# Altium PCB obc_comm.PcbDoc (part 2 of 3)
Units mm, origin at the board's own origin, x right, y up, seen from the top; angles counter-clockwise.
Board outline 95.89 x 90.17 mm, 4 copper layers (Top Signal, Ground Plane, Power Plane, Bottom Signal), stack 0.844 mm thick; 224 components, 179 nets, 944 pads, 422 vias.
Unrouted connection lines stored in the file: 347.
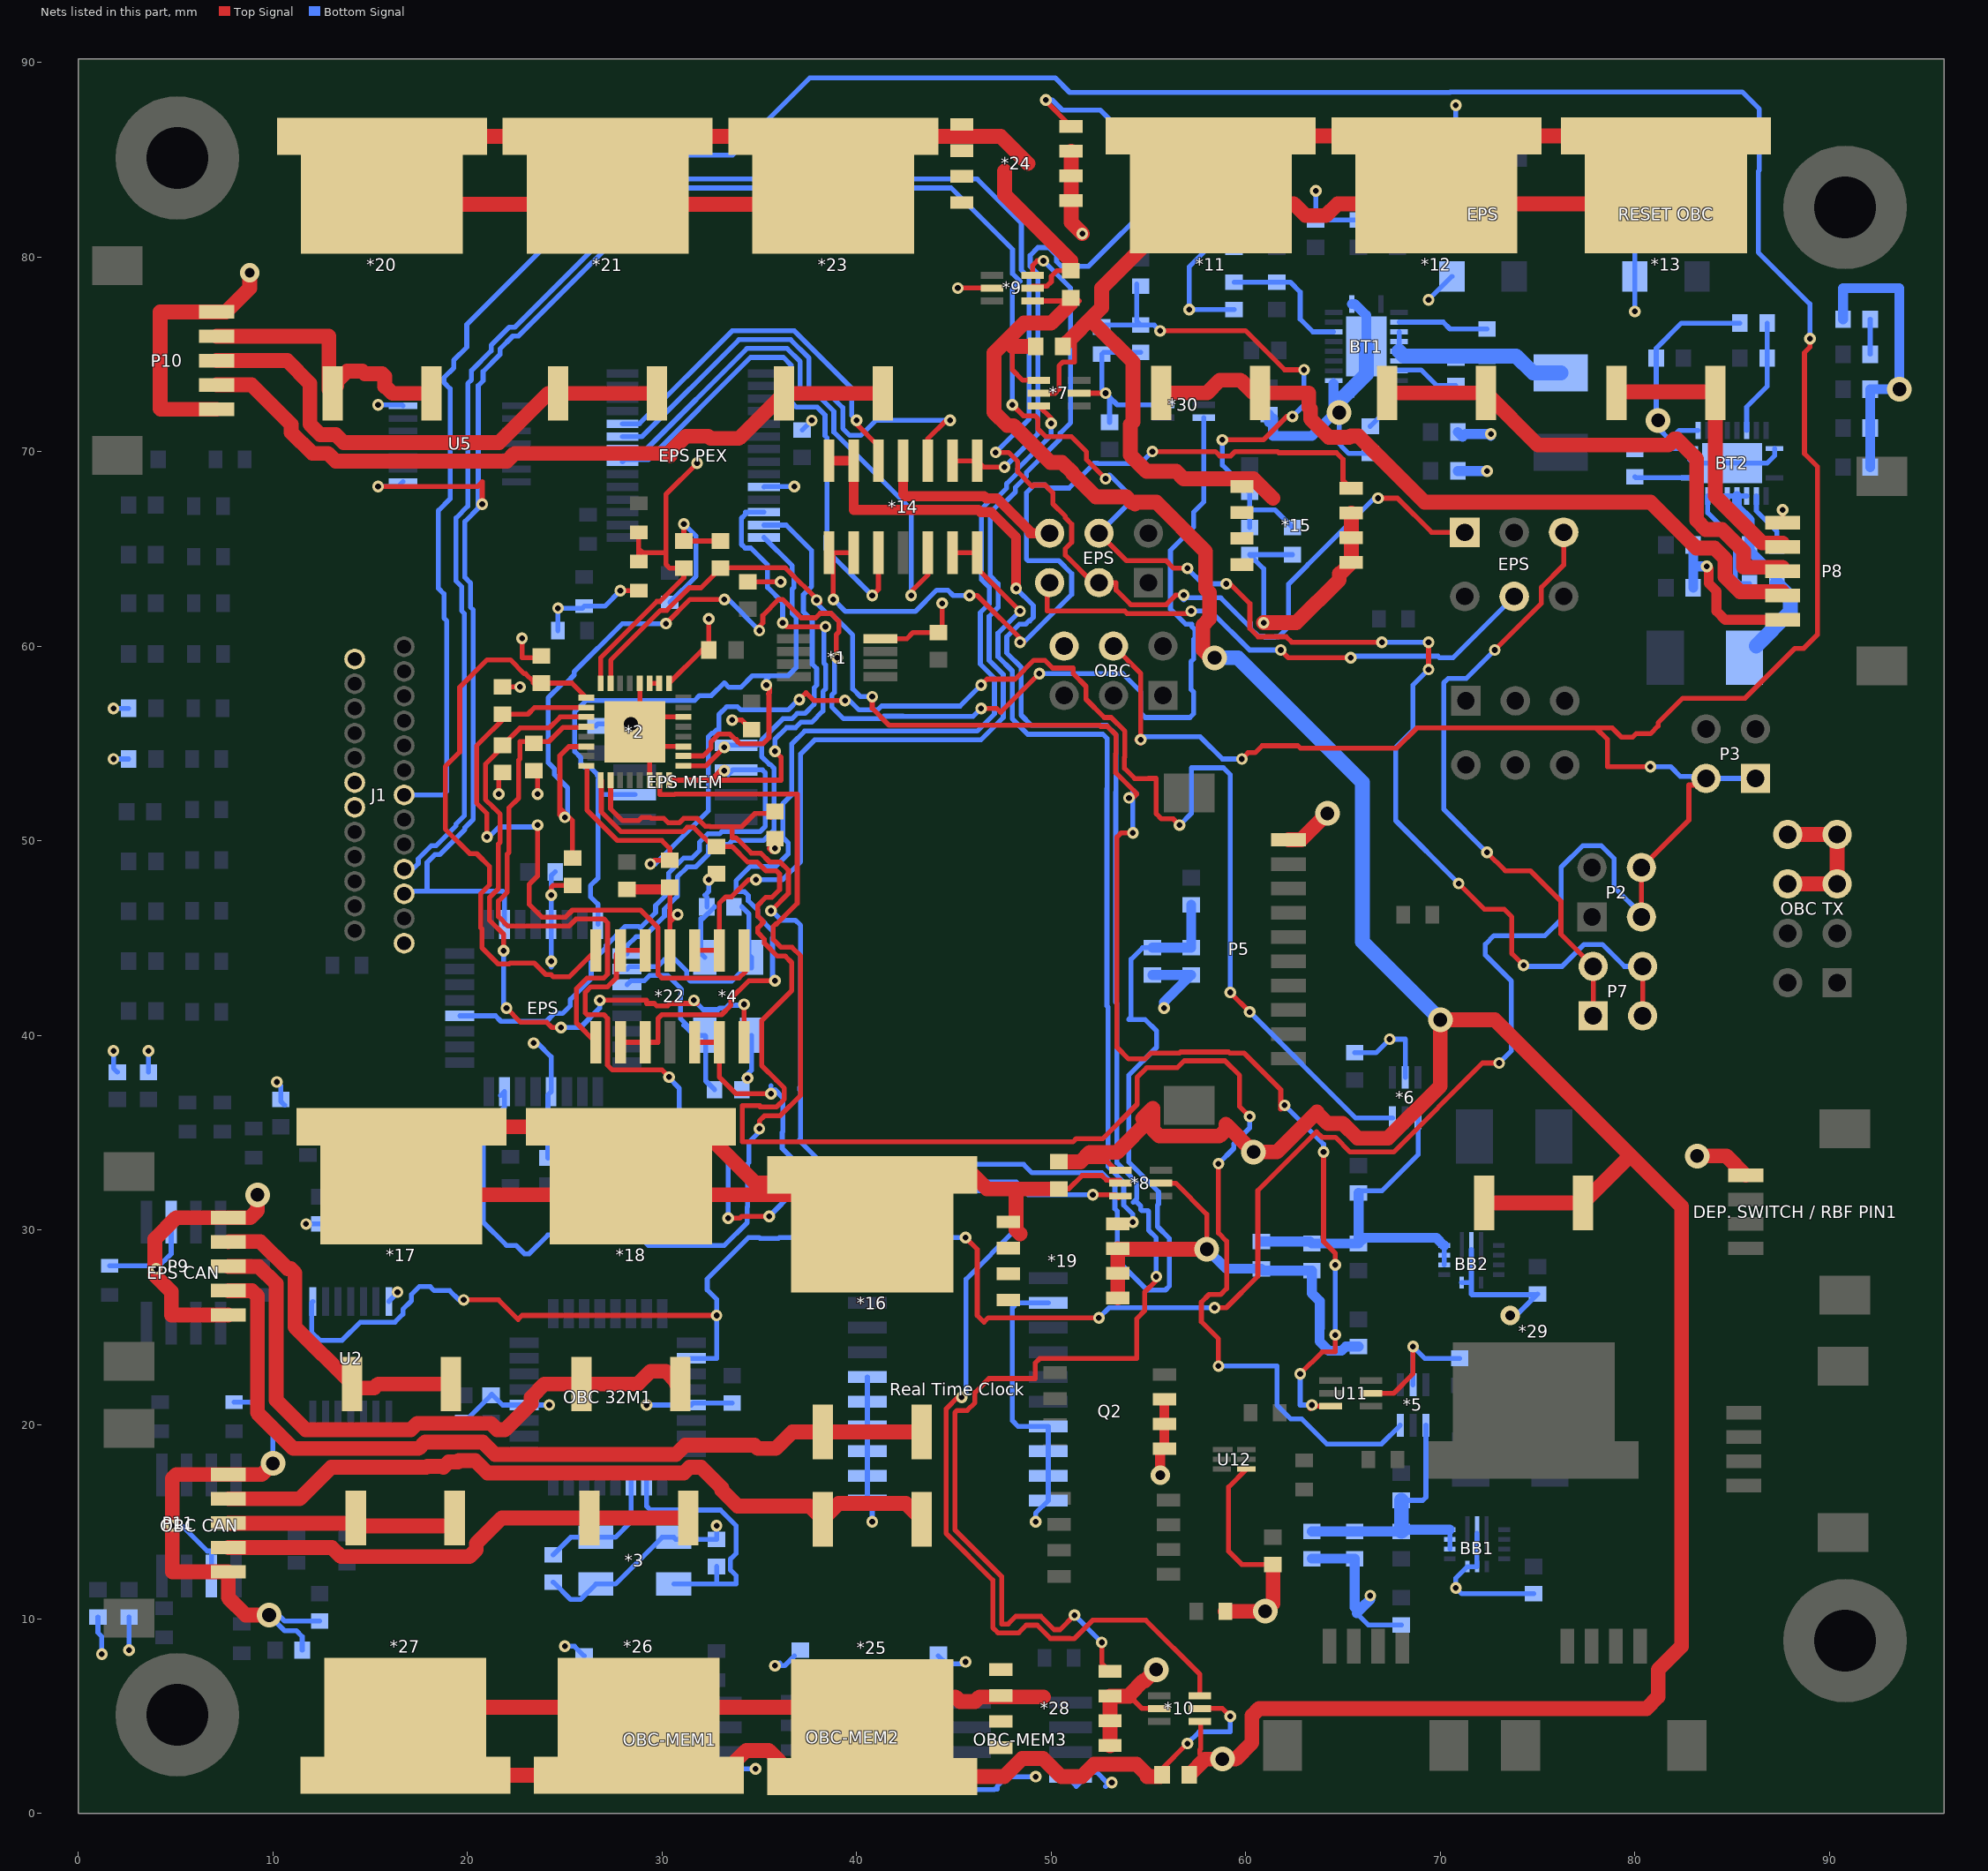
[diagram p4: the nets of this part, all layers, seen from the top]

## Via types
v1: diameter 0.6, hole 0.3, Top Signal to Bottom Signal, 390 vias
v2: diameter 1.27, hole 0.711, Top Signal to Bottom Signal, 24 vias
v3: diameter 1, hole 0.5, Top Signal to Bottom Signal, 6 vias
v4: diameter 2.794, hole 2.794, Top Signal to Bottom Signal, 2 vias

## Nets (pads, with @x,y where several pads share a name; then routed paths per layer and width w, separated by ;. In a path a pad name is that pad's centre, name@x,y a point inside that pad or via, vN(x,y) a via of type N, cw(c..) or ccw(c..) an arc to the next point about the centre after c; other vN are vias at no path point) (continued)
EPS_MOSI_A: EPS.2@21.9,45.7 EPS.4@52.46,65.8 J1.3 P7.2 P7.4 U5.1 | length 146
  Top Signal w0.254: v1(15.4,68.2) 20.511,68.2 20.756,68.444 v1(20.756,67.292) ; v1(48,72.4) v1(48,72.4) 48.566,71.835 49.165,71.835 49.319,71.681 49.319,71.167 49.718,70.768 51.032,70.768 51.818,69.982 51.818,69.582 v1(52.8,68.6) ; EPS.4@52.46,65.8 53.869,64.391 55.908,64.391 56.299,64 v1(57,64) ; v1(59,63.2) 59.2,63.2 60.212,62.188 60.212,60.907 60.638,60.481 62.082,60.481 62.363,60.2 v1(67,60.2) ; v1(69.4,58.8) v1(69.4,60.2) ; v1(70.945,47.8) 72.264,46.481 73.282,46.481 73.681,46.082 73.681,44.199 v1(74.28,43.6) ; P7.2@80.4,41 P7.4@80.4,43.54
  Bottom Signal w0.254: v1(15.4,68.2) 16.435,68.2 U5.1@16.679,68.444 ; J1.3@16.74,47.275 16.865,47.4 18,47.4 ; v1(20.756,67.292) v1@20.6,67.136 ; EPS.2@21.9,45.7 21.9,47.3 21.8,47.4 18,47.4 ; v1(48,72.4) 48,78.353 48.4,78.753 48.011,79.142 48.011,80.389 44.854,83.546 30.23,83.546 22.619,75.935 22.33,75.935 21.665,75.27 21.665,74.981 20.8,74.116 20.8,73.642 20.549,73.391 20.549,67.187 v1@20.6,67.136 ; EPS.4@52.46,65.8 54,67.34 54,67.8 53,68.8 v1(52.8,68.6) ; v1(57,64) 57.8,63.2 v1(59,63.2) ; v1(67,60.2) v1(69.4,60.2) ; v1(69.4,58.8) 68.6,58 68.6,55.684 67.708,54.792 67.708,51.037 v1(70.945,47.8) ; v1(74.28,43.6) 74.34,43.54 76.261,43.54 77.392,44.671 78.328,44.671 79.459,43.54 P7.4@80.4,43.54 ; 18,47.4 17.919,47.481 17.919,48.882 18.318,49.281 18.565,49.281 19.865,50.581 19.865,50.67 20.297,51.102 20.297,61.856 20.146,62.007 20.146,63.249 19.865,63.53 19.865,66.401 v1@20.6,67.136
EPS_PGM_RST: EPS.5@49.92,63.26 EPS.5@73.8,62.549 | length 28
  Top Signal w0.254: EPS.5@49.92,63.26 49.8,63.14 49.8,61.8 53.779,61.8 53.904,61.675 57.075,61.675 v1(57.2,61.8) ; v1(61.8,59.8) 62.2,59.4 v1(65.4,59.4)
  Bottom Signal w0.254: v1(57.2,61.8) 58.201,61.8 60.201,59.8 v1(61.8,59.8) ; v1(65.4,59.4) 65.481,59.481 69.882,59.481 69.963,59.4 70.651,59.4 EPS.5@73.8,62.549
EPS_RX: EPS.3@76.34,65.851 P7.1 P7.3 | length 31.9
  Top Signal w0.254: v1(72.4,49.4) 73.342,48.458 74.626,48.458 76.2,46.884 76.2,45.2 P7.3@77.86,43.54 P7.1@77.86,41 ; v1(72.8,59.8) 75.197,62.197 75.197,63.022 76.34,64.165 EPS.3@76.34,65.851
  Bottom Signal w0.254: v1(72.4,49.4) 70.177,51.623 70.177,58.111 70.4,58.334 71.334,58.334 v1(72.8,59.8)
EPS_SCK_A: EPS.1@71.26,65.851 EPS.3@52.46,63.26 J1.4 | length 110.2
  Top Signal w0.254: v1(47.148,69.956) 47.807,69.956 48.281,69.482 48.281,68.956 49.037,68.2 49.118,68.281 49.682,68.281 50.081,67.882 50.081,67.319 50.729,66.671 50.729,66.59 51.051,66.268 51.051,65.332 50.729,65.01 50.729,64.671 52.14,63.26 EPS.3@52.46,63.26 53.34,63.26 53.34,62.881 54.092,62.129 55.908,62.129 56.399,62.62 v1(56.812,62.62) ; v1(66.8,67.6) 67.8,67.6 69.549,65.851 EPS.1@71.26,65.851
  Bottom Signal w0.254: J1.4@16.74,48.545 17.187,48.545 17.465,48.823 17.465,49.07 18.13,49.735 18.377,49.735 19.411,50.769 19.411,50.858 19.843,51.29 19.843,61.668 19.692,61.819 19.692,63.061 19.411,63.342 19.411,66.589 20.013,67.191 20.013,73.497 20.2,73.684 20.2,74.158 21.211,75.169 21.211,75.458 22.142,76.389 22.431,76.389 30.042,84 46.2,84 48.465,81.735 48.465,79.33 48.865,78.93 48.865,71.665 47.156,69.956 v1(47.148,69.956) ; v1(56.812,62.62) 56.812,62.375 56.918,62.481 58.719,62.481 60.239,60.961 ; 60.239,61.2 60.239,60.961 ; v1(66.8,67.6) 66.6,67.6 63.177,64.177 63.177,64.165 62.2,63.188 62.2,61 61.681,60.481 61.518,60.481 61.476,60.439 61,60.439 60.92,60.519 60.638,60.519 60.239,60.918 60.239,60.961
G1: *14.1 *14.2 *15.2 | length 45.7
  Top Signal w0.254: v1(38.8,62.4) 38.8,64.58 *14.1@38.58,64.8 *14.2@39.85,64.8 ; v1(45.8,62.6) 46.2,62.6 48.6,60.2 v1(48.4,60.2) ; v1(55.2,70) 58.437,70 58.664,69.773 59.228,69.773 59.455,70 61.633,70 61.696,69.937 64.663,69.937 65,69.6 65,68.53 *15.2@65.425,68.105
  Bottom Signal w0.254: v1(38.8,62.4) 39.416,61.784 43.021,61.784 44.118,62.881 44.682,62.881 44.963,62.6 v1(45.8,62.6) ; v1(48.4,60.2) 48.6,60.2 51.051,62.651 51.051,63.728 50.388,64.391 48.809,64.391 48.719,64.481 48.719,67.882 49.118,68.281 49.682,68.281 49.841,68.122 50.922,68.122 52.2,69.4 52.388,69.4 52.415,69.373 54.573,69.373 v1(55.2,70)
G2: *14.6 *14.7 *19.2 | length 43
  Top Signal w0.254: *14.6@44.93,64.8 *14.7@46.2,64.8 46.2,64 v1(48.4,61.8) ; *19.2@53.425,30.305 53.52,30.4 v1(54.2,30.4)
  Bottom Signal w0.254: v1@48.4,61.708 48.303,61.708 47.265,60.67 47.265,59.456 48,58.721 48,56.266 48.795,55.471 52.658,55.471 52.881,55.248 52.881,52.686 52.865,52.67 52.865,41.516 52.93,41.451 52.93,33.257 53.728,32.458 53.728,31.272 54.2,30.8 v1(54.2,30.4)
G3: *14.8 *14.9 *24.2 | length 33.9
  Top Signal w0.254: *14.9@44.93,69.524 *14.8@46.2,69.524 46.524,69.2 v1(47.6,69.2) ; v1(49.73,88.07) 49.73,88 *24.2@51.025,86.705
  Bottom Signal w0.254: v1(47.6,69.2) 49.319,70.919 49.319,79.118 48.919,79.518 48.919,80.082 49.318,80.481 49.882,80.481 50.281,80.082 50.281,79.761 50.524,79.518 51.918,79.518 55.4,83 55.4,84.671 52.525,87.546 50.575,87.546 50.051,88.07 v1(49.73,88.07)
G4: *14.13 *14.14 *28.2 | length 93.6
  Top Signal w0.254: v1(51.2,10.2) 50.454,9.454 50.151,9.454 49.47,10.135 48.18,10.135 47.791,9.746 47.454,9.746 47.454,12.188 45.054,14.588 45.054,20.612 45.161,20.719 45.682,20.719 46.081,21.118 46.081,21.639 46.8,22.358 49.188,22.358 49.188,23.168 49.411,23.391 54.4,23.391 54.4,25.441 54.806,25.847 54.806,26.806 55.4,27.4 v1(55.4,27.6) ; v1(52.6,8.8) 52.6,7.73 *28.2@53.025,7.305
  Top Signal w0.508: *14.14@38.58,69.524 *14.13@39.85,69.524 39.85,67 46.256,67 46.372,66.884 46.916,66.884 48.2,65.6 v1(48.2,62.963)
  Bottom Signal w0.254: v1(48.2,62.963) 49.081,62.082 49.081,61.478 48.901,61.298 48.861,61.298 48.682,61.119 48.356,61.119 47.719,60.482 47.719,59.644 48.454,58.909 48.454,56.454 48.983,55.925 52.846,55.925 53.335,55.436 53.335,52.498 53.319,52.482 53.319,41.704 53.384,41.639 53.384,33.445 54.4,32.429 54.4,31.6 54.221,31.421 ; v1(51.2,10.2) v1(52.6,8.8) ; 54.311,31.511 54.6,31.221 54.6,31.042 54.656,30.986 54.977,30.986 55.011,30.952 55.011,29.984 55.4,29.595 v1(55.4,27.6)
GND: 3V3.2 6.1 7.1 8.1 9.1 10.1 15.1 16.1 17.1 18.1 19.1 "DEP. SWITCH / RBF PIN1.1" "EPS CAN.2" "EPS MEM.4" "EPS PEX.10" "OBC 32M1.5" "OBC 32M1.20" "OBC CAN.2" "OBC TX.5" "OBC TX.6" "OBC TX.7" "OBC TX.8" "Real Time Clock.2" "Real Time Clock.7" "Real Time Clock.8" "Real Time Clock.9" "Real Time Clock.10" "Real Time Clock.11" "Real Time Clock.12" "Real Time Clock.13" "Real Time Clock.14" "Real Time Clock.15" "Real Time Clock.16" "RESET OBC.2" *1.4 *2.1 *2.4 *2.22 *2.27 *2.30 *2.33 *3.2 *3.4 *4.2 *4.4 *5.2 *6.2 *7.2 *8.2 *9.2 *10.2 *14.11 *15.1 *19.1 *22.11 *24.1 *28.1 *30.2 BB1.2 BB1.9 BB1.10 BB2.2 BB2.9 BB2.10 BT1.11 BT1.12 BT1.20 BT1.21 BT2.11 BT2.12 BT2.20 BT2.21 C1.2 C2.1 C3.1 C4.2 C5.2 C6.2 C7.2 C8.2 C9.2 C10.2 C11.2 C12.2 C13.2 C14.2 C15.2 C17.1 C18.1 C19.2 C20.1 C21.1 C22.1 C23.1 C24.1 C25.2 C26.1 C27.1 C28.1 C29.1 C30.1 C31.1 C32.1 C33.1 C34.1 C35.2 C36.1 C37.1 C38.1 C39.1 C40.2 C41.1 C42.2 C43.2 C44.1 Ccomp1.1 Ccomp2.1 Cin1.1 Cin2.1 Cin3.1 Cin4.1 CinA1.1 CinA2.1 Cout1.1 Cout2.1 Coutx1.1 Coutx2.1 CvccA1.1 CvccA2.1 D12.2 EPS.2@70.6,79 EPS.2@70.6,85.4 EPS.5@24.3,45.7 EPS.6@49.92,65.8 EPS.20 J1.1 J1.19 J1.20 J1.25 OBC-MEM1.4 OBC-MEM2.4 OBC-MEM3.4 OBC.6@50.66,60 P5.10 P8.1 P8.5 P9.1 P9.5 P10.1 P10.5 P11.1 P11.5 Q2.1 R11.1 R12.1 R13.1 R22.2 R32.1 R39.1 R48.1 R49.2 Rfbb1.1 Rfbb2.1 RlimA1.1 RlimA2.1 U2.7 U5.7 U11.2 U12.4 | length 448.9
  Top Signal w0.254: v1(21.6,52.4) 21.6,53.3 C13.2@21.8,53.5 ; C11.2@21.8,57.9 v1(22.7,57.9) ; v1(22.8,60.4) 22.8,59.4 C9.2@24,59.4 ; C15.2@23.4,53.6 23.6,53.4 v1(23.6,52.4) ; v1(24.3,47.2) 24.3,47.6 24.4,47.7 C14.2@25.4,47.7 ; v1(27.85,62.85) R48.1@28.8,62.85 ; *2.33@28.854,56 *2.4@28.854,58.089 ; *2.22@29.362,53.111 *2.33@29.362,54.838 ; *2.1@30.353,58.089 32.063,59.8 C4.2@32.4,59.8 v1(32.4,61.4) ; *22.11@30.4,44.362 30.4,45.8 ; C10.2@30.4,47.6 30.4,45.8 ; v1(30.8,46.2) 30.4,45.8 ; *2.27@31.089,54.838 *2.33@29.362,54.838 ; *2.30@31.089,56.362 29.362,56.362 *2.33@28.6,55.6 *2.33@29.362,54.838 ; v1(31.12,66.28) C7.2@31.12,65.4 C5.2@33,65.4 ; v1(32.4,48) 32.5,48 C8.2@32.8,48.3 C8.2@32.5,48.3 ; v1(33.6,56.2) 34.1,56.2 C1.2@34.6,55.7 ; C3.1@34.4,63.3 v1(36.1,63.3) ; v1@35.773,49.573 35.527,49.573 v1@35.5,49.6 ; C6.2@35.8,50.1 v1(35.8,49.6) ; *1.4@41.223,60.375 42.575,60.375 42.9,60.7 C2.1@44.2,60.7 44.4,60.9 v1(44.4,62.2) ; v1(45.2,78.4) *9.2@46.959,78.4 ; *7.2@51.441,73 v1(52.8,73) ; 54.035,6.035 54.67,5.4 *10.2@55.559,5.4 ; *8.2@55.641,32.4 56.4,32.4 58,30.8 v2(58,29) ; U12.4@60.03,17.7 59.119,16.789 59.119,13.481 59.8,12.8 C44.1@61.4,12.8 ; U11.2@66.441,21.6 67.6,21.6 68.6,22.6 v1(68.6,24) ; P8.1@87.6,66.35 v1(87.6,67) ; v1@35.5,49.6 v1(35.8,49.6) ; v1@35.5,49.6 35.65,49.45 v1(35.8,49.6)
  Top Signal w0.508: C12.2@28.2,47.5 30.3,47.5 C10.2@30.4,47.6 ; *14.11@42.39,69.524 42.39,67.81 42.492,67.708 46.549,67.708 46.665,67.592 47.209,67.592 48.908,65.893 48.908,65.8 EPS.6@49.92,65.8 ; Q2.1@55.6,18.536 Q2.1@55.819,18.755 Q2.1@55.819,20.025 Q2.1@55.819,21.295 ; v3(55.6,17.4) Q2.1@55.6,18.536 ; v1(83.7,64.1) 83.8,64 83.8,63.219 84.2,62.819 84.2,61.8 84.65,61.35 P8.5@87.6,61.35
  Top Signal w0.762: 3.93,27.674 4.775,26.829 4.775,25.625 P9.1@7.7,25.625 ; v1@3.93,28 3.93,29.53 5.025,30.625 P9.5@7.7,30.625 8.825,30.625 9.2,31 v2(9.2,31.8) ; P10.1@7.1,72.175 4.225,72.175 4.2,72.2 4.2,77.175 P10.5@7.1,77.175 7.575,77.175 8.8,78.4 v3(8.8,79.2) ; v2(9.8,10.2) 8.6,10.2 7.7,11.1 P11.1@7.7,12.425 4.825,12.425 4.825,17.225 5.025,17.425 P11.5@7.7,17.425 9.425,17.425 v2(10,18) v2@10.2,18 ; *24.1@51.025,85.435 *24.1@51.025,84.165 *24.1@51.025,82.895 51.025,81.775 v1(51.6,81.2) ; *28.1@53.025,3.495 *28.1@53.025,4.765 *28.1@53.025,6.035 54.035,6.035 54.035,6.12 54.734,6.819 54.819,6.819 v2(55.4,7.4) v2@55.4,7.6 ; *19.1@53.425,26.495 *19.1@53.425,27.765 *19.1@53.425,29.035 53.46,29 v2(58,29) ; R49.2@58.95,10.4 v2(61,10.4) 61.4,10.8 C44.1@61.4,12.8 ; v1(60.92,61.2) 62.6,61.2 64.81,63.41 64.81,63.722 64.852,63.722 *15.1@65.425,64.295 *15.1@65.425,65.565 *15.1@65.425,66.835 ; P5.10@62.2,50.05 62.85,50.05 v2(64.2,51.4) ; v2(83.2,33.8) 84.7,33.8 85.7,32.8 ; 87.86,47.78 90.4,47.78 90.4,50.32 87.86,50.32
  Bottom Signal w0.254: C32.1@1,10.1 1,9.3 1.2,9.1 v1(1.2,8.2) v1@1.2,8.4 ; R39.1@1.6,28.15 3.85,28.15 v1(4,28) 4.765,28.765 4.765,30.4 ; v1(1.8,39.2) 1.8,38.3 C37.1@2,38.1 ; v1(1.8,54.2) 3V3.2@2.578,54.2 ; v1(1.8,56.8) D12.2@2.578,56.8 ; v1(2.6,8.4) C31.1@2.6,10.1 ; C36.1@3.6,38.1 v1(3.6,39.2) ; v1(4.8,14.8) 5.316,14.8 6.624,13.492 6.835,13.492 6.835,12.2 ; R32.1@8,21.15 8.85,21.15 10,20 v2(10,18) ; v1(10.2,37.6) 10.4,37.4 10.4,36.6 C38.1@10.6,36.4 ; C34.1@11.5,8.4 11.5,9.1 11.2,9.4 10.6,9.4 v2(9.8,10.2) 10.3,10.2 10.6,9.9 C33.1@12.4,9.9 ; v1(11.7,30.3) C39.1@12.4,30.3 ; v1(15.402,72.402) 16.633,72.402 U5.7@16.679,72.356 ; U2.7@15.956,26.321 16.4,26.765 v1(16.4,26.8) ; C19.2@19.8,20.1 C18.1@21.2,21.5 21.25,21.55 21.8,21 22.9,21 v1(24.2,21) ; v1(23.4,39.6) 23.6,39.6 24.3,38.9 EPS.20@24.3,37.1 24.133,36.933 24.133,35.2 ; C25.2@24.133,33.7 24.133,35.2 ; 24.3,43.5 v1(24.3,43.8) 24.3,48.2 C23.1@24.5,48.4 ; C20.1@24.4,11.9 25.3,11 25.8,11 *3.4@26.6,11.8 27.6,11.8 30,14.2 *3.2@30.6,14.2 30.7,14.1 C21.1@32.8,14.1 v1(32.8,14.8) ; R12.1@24.65,60.8 v1(24.65,61.95) 25.9,61.95 R11.1@26,62.05 27.05,62.05 v1(27.85,62.85) ; v1(25,8.6) 25.5,8.6 C35.2@26,8.1 ; C24.1@26.067,33.7 24.567,35.2 24.133,35.2 ; C40.2@26.6,55.9 26.7,56 v2(28.4,56) 28.6,55.8 28.6,54.905 ; v1(29.2,21) 31.5,21 31.6,21.1 C17.1@33.6,21.1 ; R13.1@30.4,62.25 31.746,63.596 31.746,65.654 v1(31.12,66.28) ; *4.2@32.2,44 32,44.2 32,46 32.1,46 C27.1@32.7,46.6 ; C27.1@32.3,46.6 32.3,47.1 32.2,47.2 32.4,47.4 v1(32.4,48) ; OBC-MEM1.4@33,1.895 33.095,1.8 33.595,2.3 v1(34.8,2.3) v1@34.9,2.3 ; v1(34.4,37.8) 34.195,37.8 34.6,38.205 *4.4@34.6,40 ; 35.232,68.174 35.258,68.2 v1(36.8,68.2) ; v1@36.054,7.746 35.908,7.6 v1(35.8,7.6) 36.3,7.6 C35.2@36.8,8.1 ; C22.1@37.2,71.1 v1(37.696,71.596) v1@37.7,71.6 ; 40.55,22.435 40.55,21.165 40.55,19.895 40.55,18.625 40.55,17.355 40.55,16.085 40.8,15.835 v1(40.8,15) ; 42.4,1.695 42.4,1.4 42.54,1.26 44.573,1.26 44.592,1.241 47.068,1.241 47.087,1.26 47.227,1.26 47.227,1.4 47.727,1.9 v1(49.2,1.9) ; C35.2@44.2,8.1 44.6,7.7 v1@45.6,7.7 ; v1(49.2,15) 49.2,15.435 49.85,16.085 49.85,17.355 49.85,18.625 49.85,19.895 48.305,19.895 48,20.2 48,26 48.245,26.245 49.85,26.245 ; OBC-MEM3.4@51,1.695 51.295,1.4 52.017,2.122 52.338,2.122 52.862,1.598 v1(53.118,1.598) 53.118,1.717 52.8,1.4 ; C41.1@53,71.5 v1@53,72.8 ; C43.2@54.6,75.1 52.7,75.1 19.1@52.6,75 52.6,73.2 v1(52.8,73) v1@53,72.8 ; *30.2@55.759,72.4 53.4,72.4 v1@53,72.8 ; 8.1@59.4,77.3 v1(57.1,77.3) 57.1,79.5 58.1,80.5 9.1@59.4,80.5 ; 10.1@60.2,64.7 60.92,63.98 v1(60.92,61.2) 60.92,62.28 ; 10.1@60.2,64.7 C42.2@62.4,64.7 ; v1(63.6,83.4) Ccomp1.1@63.6,81.9 RlimA1.1@65.8,81.9 CvccA1.1@67.8,81.9 ; 64.515,73.485 BT1.12@64.515,73.65 ; v2(64.8,72) 64.8,70.97 64.515,70.685 65.3,69.9 6.1@66.4,69.9 ; 65.6,10.6 65.8,10.6 v1(66.4,11.2) ; C30.1@65.6,39.1 66.7,39.1 v1(67.4,39.8) 68.2,39.8 *6.2@68.2,37.841 ; 65.7,10.3 66.3,9.7 Rfbb1.1@68,9.7 ; *5.2@68.6,22.041 v1(68.6,24) 69.2,23.4 C29.1@71,23.4 ; v1(69.4,77.8) EPS.2@70.6,79 ; EPS.2@70.6,85.4 70.8,85.6 v1(70.8,87.8) ; BB2.10@71.1,27.295 BB2.9@71.6,27.295 ; BB2.2@71.6,29 BB2.9@71.6,27.295 ; BB1.2@71.89,14.4 BB1.9@71.89,12.695 BB1.10@71.39,12.695 70.8,12.105 v1(70.8,11.6) 71.1,11.3 Cin1.1@74.8,11.3 ; v3(73.6,25.6) 73.9,25.6 Cin2.1@74.968,26.668 ; Cin2.1@75,26.7 Cin2.1@74.968,26.668 ; 15.1@80,70.1 80.05,70.15 81.35,70.15 ; v1(80,77.2) 80,79 80,85.4 ; BT2.12@83.25,71.085 82.285,71.085 81.8,70.6 ; 17.1@85.4,76.6 82.4,76.6 81.1,75.3 16.1@81.1,74.8 81.1,71.7 v2(81.2,71.6) 81.2,71.2 81.8,70.6 ; BT2.20@87.185,70.15 87.185,69.785 86.8,69.4 BT2.21@85,69.4 83,69.4 82.815,69.585 BT2.11@82.815,70.15 81.35,70.15 ; v1@45.6,7.7 v1(45.6,7.8) v1@45.6,7.7 ; BB2.9@71.6,27.295 71.6,26.695 71.627,26.668 Cin2.1@74.968,26.668 ; 81.35,70.15 81.8,70.6
  Bottom Signal w0.508: C28.1@55.2,43.1 R22.2@57.2,43.1 55.8,41.7 v1(55.8,41.4) ; v2(58,29) 59,28 Cout2.1@60.8,28 60.9,27.9 Coutx2.1@63.4,27.9 63.4,26.743 63.808,26.335 63.808,24.951 63.792,24.935 63.792,24.265 64.265,23.792 64.935,23.792 65.143,24 Rfbb2.1@65.8,24 ; 7.1@61.2,71.9 61.2,71.5 61.4,71.7 61.4,70.8 63.4,70.8 64.6,72 v2(64.8,72) 64.8,72.235 v2@64.515,72.52 ; Cout1.1@63.4,13.1 Coutx1.1@65.6,13.1 65.6,10.6 ; 64.515,73.485 v2@64.515,72.52 ; v2@64.635,72.4 v2@64.515,72.52 ; BT1.20@65.45,77.585 65.615,77.585 66.2,77 BT1.21@66.2,75.4 ; 65.7,10.3 66.4,11 v1(66.4,11.2) ; CinA1.1@70.9,69 v1(72.4,69) ; Cin3.1@70.9,71 71.15,70.75 71.3,70.9 v1(72.6,70.9) v1@72.6,70.8 ; CinA2.1@83,63 83,64.1 ; Cin4.1@83,65.2 83,64.1 ; v1(83.7,64.1) 83,64.1 ; 18.1@90.7,76.8 90.7,78.4 93.6,78.4 v2(93.6,73.2) Ccomp2.1@92.1,73.2 RlimA2.1@92.1,71.2 CvccA2.1@92.1,69.2
  Bottom Signal w0.762: v2@64.635,72.4 BT1.11@65.45,73.215 66.2,73.965 BT1.21@66.2,75.4
I1: *7.6 *22.2 *22.3 | length 55.1
  Top Signal w0.254: *22.2@27.86,39.638 *22.3@29.13,39.638 29.794,39.638 29.794,40.865 29.985,41.057 33.057,41.057 33.529,41.529 33.529,41.872 34.457,42.8 v1(35.8,42.8) ; *7.6@49.359,72.34 50,71.698 v1(50,71.449)
  Bottom Signal w0.254: v1(35.8,42.8) 35.676,42.924 35.676,45 35.719,45.043 35.719,45.318 34.919,46.118 34.919,46.423 34.427,46.915 34.427,47.185 34.235,47.377 33.8,47.377 33.8,47.936 34.545,48.681 35.844,48.681 36.481,49.318 36.481,49.882 36.211,50.152 36.211,51.908 36.665,52.362 36.665,54.976 37.324,55.635 46.198,55.635 47.081,56.518 47.081,58.356 46.357,59.08 46.357,61.72 46.816,62.179 46.816,63.021 46.422,63.415 46.422,67.059 47.082,67.719 47.315,67.719 47.714,68.118 47.714,68.351 48.281,68.918 48.281,69.123 50,70.842 v1(50,71.449)
I2: *8.6 *22.5 *22.6 | length 28.3
  Top Signal w0.254: *22.5@31.67,39.638 *22.6@32.94,39.638 32.94,37.86 33.8,37 v1(35.6,37) ; *8.6@53.559,31.74 53.458,31.639 53.297,31.8 v1@52.2,31.8 ; v1@52.2,31.8 v1(52.139,31.8) 52.2,31.739 v1@52.2,31.8
  Bottom Signal w0.254: v1(35.6,37) 35.6,37.4 ; v1@35.8,37.2 36.211,36.789 36.211,35.048 36.173,35.01 36.173,34.185 37.904,32.454 48.212,32.454 48.654,32.012 48.654,31.97 48.824,31.8 v1(52.139,31.8)
I3: *9.6 *22.9 *22.10 | length 53.2
  Top Signal w0.254: *22.10@31.67,44.362 *22.9@32.94,44.362 32.94,46.777 33.282,47.119 33.574,47.119 34.455,48 v1(34.827,48) ; *9.6@49.041,79.06 49.041,79.559 49.283,79.8 v1(49.6,79.8)
  Bottom Signal w0.254: v1(34.827,48) 36.2,48 37.119,48.919 37.119,54.458 37.842,55.181 46.386,55.181 47.535,56.33 47.535,58.544 46.811,59.268 46.811,61.532 47.27,61.991 47.27,63.209 46.876,63.603 46.876,66.871 47.27,67.265 47.504,67.265 48.168,67.93 48.168,68.163 48.735,68.73 48.735,68.935 50.454,70.654 50.454,70.94 51,71.486 51,78.4 v1(49.6,79.8)
I4: *10.6 *22.12 *22.13 | length 75.5
  Top Signal w0.254: *22.12@29.13,44.362 *22.13@27.86,44.362 27.65,44.153 27.65,42.947 27.193,42.489 26.331,42.489 26.054,42.212 26.054,41.146 26.143,41.057 27.005,41.057 27.196,40.865 27.196,38.467 27.445,38.219 29.998,38.219 v1(30.363,37.854) ; v1(33.4,30.6) 34,30.6 34.092,30.692 v1(35.508,30.692) ; v1(45.4,21.4) 45.2,21.4 44.6,20.8 44.6,14.4 47,12 47,9.558 47.266,9.292 48.329,9.292 48.718,9.681 49.282,9.681 49.963,9 50.963,9 50.979,8.984 51.179,8.984 52.13,9.935 54.865,9.935 57.641,7.159 *10.6@57.641,6.06
  Bottom Signal w0.254: v1(30.363,37.854) 30.363,37.8 30.881,37.282 30.881,35.998 33.4,33.479 v1(33.4,30.6) ; v1(35.508,30.692) 36.816,32 48.024,32 48.2,31.824 48.2,30.042 45.627,27.469 45.627,21.627 v1(45.4,21.4)
MOSI_A: "OBC 32M1.2" J1.7 OBC.4@53.2,60 P2.2 P2.4 P3.1 P3.2 U2.1 | length 297.9
  Top Signal w0.254: v1(19.8,26.4) 21.6,26.4 22.6,25.4 22.8,25.6 v1(32.8,25.6) ; v1(45.6,29.6) 46.2,29 46.2,25.6 46.546,25.254 46.773,25.481 v1(52.454,25.481) ; OBC.4@53.2,60 54.6,58.6 54.6,55 54.406,55.194 v1(54.6,55.194) ; v1(58.4,26) 59,26 60.623,27.623 60.623,32.021 63.639,35.038 63.919,34.757 64.606,34.757 65.363,34 67.6,34 72.172,38.572 v1(73.028,38.572) ; v1(59.8,54.2) 60.119,54.519 60.482,54.519 60.844,54.881 62.682,54.881 62.817,54.746 67.746,54.746 68.8,55.8 78,55.8 ; P2.2@80.34,46.08 P2.4@80.34,48.62 82.78,51.06 82.78,52.86 83.32,52.86 P3.2@83.66,53.2 ; v1(80.8,53.8) 78.6,53.8 78.6,55.2 78,55.8 ; v1(89,75.8) 89,75.363 88.719,75.082 88.719,69.894 89.381,69.232 89.381,60.581 88.685,59.885 88.23,59.885 85.67,57.325 82.463,57.325 81.195,56.057 81.195,55.895 80.8,55.5 80.063,55.5 79.882,55.319 79.318,55.319 78.837,55.8 78,55.8
  Bottom Signal w0.254: U2.1@12.044,26.321 11.998,26.275 11.998,24.718 12.397,24.319 13.548,24.319 14.486,25.257 14.974,25.257 14.982,25.257 16.269,25.257 16.679,25.667 16.679,25.921 17.119,26.361 17.119,26.682 17.518,27.081 18.082,27.081 18.282,26.881 19.082,26.881 19.563,26.4 v1(19.8,26.4) ; J1.7@16.74,52.355 18.755,52.355 18.935,52.535 18.935,61.292 18.784,61.442 18.784,62.685 18.503,62.966 18.503,66.965 19.105,67.567 19.105,73.233 18.784,73.554 18.784,73.784 19.292,74.292 19.292,74.692 19.962,75.362 19.962,76.525 26.583,83.146 27.904,83.146 29.997,85.239 33.631,85.239 37.597,89.205 50.2,89.205 50.951,88.454 70.491,88.454 70.518,88.481 85.519,88.481 86.4,87.6 86.4,84.453 86.346,84.399 86.346,80.239 89,77.585 v1(89,75.8) ; 31.5,23.4 32.8,23.4 32.8,26.437 32.319,26.918 32.319,27.482 32.418,27.582 34.437,29.6 34.995,29.6 35.038,29.557 35.978,29.557 36.021,29.6 44.6,29.6 v1(45.6,29.6) ; v1(52.454,25.481) 52.973,26 v1(58.4,26) ; v1(54.6,55.194) 54.6,55.4 54.546,55.346 57.654,55.346 58.8,54.2 v1(59.8,54.2) ; v1(73.028,38.572) 73.657,39.2 73.657,42.78 72.319,44.118 72.319,44.682 72.756,45.119 75.382,45.119 76.215,45.952 76.215,48.634 77.332,49.751 78.268,49.751 78.931,49.088 78.931,47.63 80.34,46.221 P2.2@80.34,46.08 ; v1(80.8,53.8) 81.84,53.8 82.34,53.3 82.9,53.3 83,53.2 P3.1@86.2,53.2
Net2_1: 2.1 3.1 BT1.4 BT1.5 BT1.6 BT1.7 LA1.2 | length 9.8
  Bottom Signal w0.254: BT1.6@67.885,75.15 BT1.5@67.885,75.65 BT1.4@67.885,76.15
  Bottom Signal w0.762: BT1.6@67.885,75.15 68.135,74.9 2.1@72.4,74.9 73.9,74.9 74.763,74.037 LA1.2@76.2,74.037
Net2_2: 2.2 BT1.3 | length 4.7
  Bottom Signal w0.254: BT1.3@67.885,76.65 70.15,76.65 70.5,76.3 2.2@72.4,76.3
Net3_2: 3.2 BT1.8 | length 3.5
  Bottom Signal w0.254: BT1.8@67.634,74.193 67.841,74.193 67.842,74.192 69.008,74.192 69.8,73.4 3.2@70.8,73.4
Net4_1: 4.1 8.2 BT1.17 | length 7
  Bottom Signal w0.254: 8.2@59.4,78.7 4.1@61.6,78.7 62.3,78.7 62.8,78.2 62.8,76.8 63.45,76.15 BT1.17@64.515,76.15
Net6_2: 6.2 BT1.10 | length 2.1
  Bottom Signal w0.254: 6.2@66.4,71.3 66.95,71.85 BT1.10@66.95,73.215
Net9_2: 9.2 RcompA1.1 | length 2.2
  Bottom Signal w0.254: 9.2@59.4,81.9 RcompA1.1@61.6,81.9
Net11_1: 11.1 12.1 BT2.4 BT2.5 BT2.6 BT2.7 LA2.2 | length 11.1
  Bottom Signal w0.254: BT2.7@84.25,67.715 BT2.6@84.75,67.715 BT2.5@85.25,67.715 BT2.4@85.75,67.715
  Bottom Signal w0.508: BT2.5@85.25,67.715 85.25,67.128 85.9,66.478 11.1@85.9,65.2 85.9,64.9 87.3,63.5 12.1@87.3,63.2
  Bottom Signal w0.762: LA2.2@86.237,60 88,61.763 88,62.5 12.1@87.3,63.2
Net11_2: 11.2 BT2.3 | length 2.9
  Bottom Signal w0.254: BT2.3@86.25,67.715 86.25,66.95 87.3,65.9 11.2@87.3,65.2
Net12_2: 12.2 BT2.8 | length 5.7
  Bottom Signal w0.254: BT2.8@83.75,67.715 83.75,66.85 85.173,65.427 85.173,63.427 85.4,63.2 12.2@85.9,63.2
Net13_1: 13.1 17.2 BT2.17 | length 5.9
  Bottom Signal w0.254: BT2.17@85.75,71.085 85.75,72.292 86.8,73.342 13.1@86.8,74.8 17.2@86.8,76.6
Net15_2: 15.2 BT2.10 | length 2.8
  Bottom Signal w0.254: 15.2@80,68.7 80.05,68.65 BT2.10@82.815,68.65
Net18_2: 18.2 RcompA2.1 | length 1.8
  Bottom Signal w0.254: RcompA2.1@92.1,75 18.2@92.1,76.8
Net*2_2: *2.2 *2.3 | length 0.5
  Top Signal w0.254: *2.3@29.362,58.089 *2.2@29.845,58.089
Net*2_7: *2.7 C5.1 U11.6 | length 84
  Top Signal w0.254: *2.7@27.355,58.089 27.359,58.092 27.359,59.28 29.918,61.839 30.239,61.839 31.4,63 32,63 C5.1@33,64 33,64.027 36.336,64.027 v1@38.119,62.244 ; v1(40.8,57.4) 40.8,56.8 41.675,55.925 52.493,55.925 52.543,55.875 52.896,55.875 53.335,55.436 53.335,54.494 53.311,54.47 53.311,53.489 54.4,52.4 54.2,52.2 v1(54,52.2) ; v1(54.2,50.4) 53.6,50.4 53.384,50.184 53.384,39.379 53.979,38.784 54.821,38.784 55.129,39.092 56.6,39.092 56.651,39.143 59.122,39.143 59.173,39.092 59.908,39.092 61.8,37.2 61.8,36.2 v1(62,36.4) ; v1(62.8,22.6) 63.926,23.726 64.6,23.726 v1(64.6,24.6) ; v1@63.321,20.8 63.46,20.94 U11.6@64.359,20.94 ; v1@63.4,20.879 v1(63.4,21) ; v1(64,34) 64,29.4 64.6,28.8 v1(64.6,28.2)
  Bottom Signal w0.254: v1(37.946,62.362) 37.946,62.208 38.473,61.681 38.682,61.681 39.8,60.563 39.8,57.8 40.2,57.4 v1(40.8,57.4) ; v1(54,52.2) 54.2,52.2 54.4,52.4 54.2,52.6 v1(54.2,50.4) ; v1(62,36.4) 64,34.4 v1(64,34) ; v1(62.8,22.6) 62.8,21 v1(63.4,21) ; v1(64.6,24.6) 64.6,27.6 v1(64.6,28.2)
Net*2_8: *2.8 C7.1 R46.1 R48.2 | length 17.6
  Top Signal w0.254: *2.8@26.847,58.089 26.847,59.41 29.73,62.293 29.893,62.293 31.12,63.52 C7.1@31.12,64 30.4,64 30.2,64.2 30.2,64.8 ; R48.2@28.8,64.35 28.8,65 ; R46.1@28.8,65.85 28.8,65 ; v1(31.8,69.4) 30.2,67.8 30.2,64.8 ; 28.8,65 29,64.8 30.2,64.8
Net*2_9: *2.9 *22.14 C9.1 | length 30.1
  Top Signal w0.254: *2.9@26.111,57.353 25.363,58.1 23.393,58.1 23.381,58.112 23.381,58.182 22.982,58.581 22.912,58.581 22.2,59.293 21.007,59.293 19.597,57.884 19.597,54.555 18.854,53.812 18.854,50.593 20.112,49.335 20.47,49.335 21.135,48.67 21.135,47.73 20.681,47.276 20.681,45.524 20.735,45.47 20.735,44.502 21.572,43.665 22.136,43.665 22.19,43.719 23.418,43.719 24.018,43.119 24.286,43.119 24.405,43 25.228,43 *22.14@26.59,44.362
Net*2_10: *2.10 *22.8 C11.1 | length 34.7
  Top Signal w0.254: v1(21,50.2) 21,51.395 20.465,51.93 20.465,54.877 22.088,56.5 C11.1@21.8,56.5 23.1,56.5 23.445,56.845 *2.10@26.111,56.845 ; v1(23.6,50.8) 23.6,48.184 23.165,47.749 23.165,46.73 23.83,46.065 25.023,46.065 25.39,46.432 28.894,46.432 29.794,45.533 29.794,43.135 29.985,42.943 33.958,42.943 34.269,43.254 34.21,43.313 *22.8@34.21,44.362
  Bottom Signal w0.254: v1(21,50.2) 21.116,50.2 21.624,50.708 23.508,50.708 v1(23.6,50.8)
Net*2_11: *2.11 *22.7 C13.1 | length 36
  Top Signal w0.254: v1(21.854,44.346) 21.854,45.188 21.135,45.907 21.135,47.088 21.589,47.542 21.589,49.826 21.681,49.918 21.681,51.356 21.318,51.719 20.919,52.118 20.919,53.931 21.8,54.812 C13.1@21.8,54.9 22.7,55.8 24.2,55.8 24.762,56.362 *2.11@26.111,56.362 ; v1(22,41.4) 22.735,40.665 24.07,40.665 24.335,40.4 v1(24.8,40.4) ; v1(26.8,41.8) 29.2,41.8 29.2,41.637 29.6,41.637 29.718,41.519 30.282,41.519 30.4,41.637 31.8,41.637 v1(31.637,41.8) ; *22.7@34.21,39.638 v1(34.21,41.59)
  Bottom Signal w0.254: v1(21.854,44.346) 21.854,41.546 v1(22,41.4) ; v1(24.8,40.4) 25.8,40.4 26.8,41.4 v1(26.8,41.8) ; v1(31.637,41.8) 32.118,41.319 32.882,41.319 32.963,41.4 33.267,41.4 33.413,41.546 34.166,41.546 v1(34.21,41.59)
Net*2_12: *2.12 *22.1 C15.1 | length 26.9
  Top Signal w0.254: *2.12@26.111,55.854 26.082,55.825 24.916,55.825 24.191,55.1 22.7,55.1 22.7,54.212 22.623,54.135 22.623,52.186 22.135,51.698 22.135,49.404 22.043,49.312 22.043,47.354 21.589,46.9 21.589,46.095 22.073,45.611 25.211,45.611 25.578,45.978 27,45.978 27.196,45.781 27.196,43.135 27.005,42.943 26.143,42.943 25.6,42.4 25.6,40.628 *22.1@26.59,39.638
Net*2_14: *2.14 *30.6 C14.1 | length 77.3
  Top Signal w0.254: 24.746,51.686 25.4,51.032 C14.1@25.4,48.9 ; v1(25,51.2) 24.876,51.2 24.746,51.33 24.746,54.371 25.21,54.835 26.108,54.835 *2.14@26.111,54.838 ; v1(30.2,61.158) 31.442,62.4 v1(33.2,62.4) v1@33.4,62.4 ; v1(35,60.8) 35,61.011 35.177,61.188 35.177,61.577 36,62.4 36.2,62.4 37.146,61.454 37.891,61.454 38.118,61.681 38.682,61.681 39.081,61.282 39.081,60.718 38.946,60.583 38.946,59.454 v1(39,59.4) ; v1(46.4,56.8) 47.2,56.8 47.4,56.6 v1(49.391,58.591)
  Bottom Signal w0.254: v1(25,51.2) 25.146,51.346 25.146,52.715 24.461,53.4 24.461,53.697 24.146,54.012 24.146,57.346 24.919,58.119 25.082,58.119 25.481,58.518 25.481,58.681 27.958,61.158 v1(30.2,61.158) ; v1(33.2,62.4) 33.4,62.4 v1(35,60.8) ; v1(39,59.4) 38.854,59.254 38.854,57.617 38.719,57.482 38.719,56.881 39.335,56.265 41.27,56.265 41.405,56.4 42.379,56.4 42.4,56.379 45.979,56.379 v1(46.4,56.8) ; v1(49.391,58.591) 53.65,58.591 53.659,58.6 54.609,57.65 54.609,56.552 54.832,56.329 57.129,56.329 57.315,56.515 57.315,57.648 57.184,57.779 57.184,59.202 57.325,59.343 57.325,60.362 57.389,60.426 57.389,60.853 57.239,61.003 57.239,61.119 56.918,61.119 56.131,61.906 56.131,62.352 56.131,64.922 57.319,66.11 57.319,66.882 57.841,67.404 *30.6@57.841,71.74
Net*2_15: 5.1 10.2 14.1 19.2 C42.1 C43.1 | length 28
  Top Signal w0.254: v1(55.6,76.2) 55.616,76.216 59.984,76.216 62,74.2 v1(63,74.2) ; v1(58.8,70.6) 60.908,70.6 62.108,71.8 v1(62.4,71.8)
  Bottom Signal w0.254: 19.2@52.6,76.4 52.7,76.5 C43.1@54.6,76.5 ; 14.1@54.4,78.6 54.4,76.7 C43.1@54.6,76.5 ; v1(55.6,76.2) 55.3,76.5 C43.1@54.6,76.5 ; v1(58.8,70.6) 58.8,69.3 5.1@60.2,67.9 60.2,67 ; 10.2@60.2,66.1 60.2,67 ; C42.1@62.4,66.1 61.5,67 60.2,67 ; v1(62.4,71.8) 63,72.4 v1(63,74.2)
Net*2_16: *2.16 *6.6 C10.1 | length 78.2
  Top Signal w0.254: *2.16@26.111,53.847 26.135,53.823 26.135,51.581 27.705,50.011 29.989,50.011 30.4,49.6 C10.1@30.4,49 29.6,49 v1(29.4,48.8) ; v1(37.054,57.254) 37.4,57.6 37.8,57.2 v1(39.4,57.2) ; v1(46.4,58) 46.704,58.304 48.141,58.304 49.109,59.272 49.673,59.272 50.076,58.869 51.128,58.869 51.128,58.591 51.791,57.928 51.791,57.27 52.732,56.329 53.084,56.329 53.789,55.624 53.789,54.306 53.765,54.282 53.765,53.718 54.287,53.196 55.005,53.196 55.009,53.2 55.4,53.2 55.4,51.388 55.665,51.123 56.277,51.123 v1(56.6,50.8) ; v1(59.2,42.2) v1(60.2,41.2)
  Bottom Signal w0.254: v1(29.4,48.8) 29.642,48.8 32.373,51.531 32.373,55.34 32.565,55.532 32.642,55.532 32.786,55.676 32.93,55.532 32.93,55.907 32.919,55.918 32.919,56.482 33.318,56.881 33.882,56.881 34.044,56.719 36.482,56.719 37.017,57.254 v1(37.054,57.254) ; v1(39.4,57.2) 39.641,57.2 40.122,56.719 41.082,56.719 41.282,56.919 45.319,56.919 v1(46.4,58) ; v1(56.6,50.8) 57.2,51.4 57.2,53.746 58.854,53.746 59.2,53.4 v1(59.2,42.2) ; v1(60.2,41.2) 65.641,35.759 *6.6@67.54,35.759
Net*2_17: *2.17 *5.6 C8.1 | length 89.4
  Top Signal w0.254: *2.17@26.847,53.111 26.876,53.111 26.876,51.482 27.893,50.465 31.07,50.465 31.297,50.692 31.624,50.692 32.616,49.7 C8.1@32.8,49.7 33.6,49.7 34.392,48.908 34.882,48.908 35.341,48.449 35.879,48.449 36.038,48.29 36.038,47.48 35.639,47.081 35.318,47.081 34.919,46.682 34.919,46.118 35.218,45.818 34.919,45.519 34.919,45.276 35.265,44.93 35.265,44.73 35.93,44.065 36.335,44.065 36.665,43.735 36.665,42.302 35.119,40.756 35.119,38.444 35.882,37.681 36.281,37.282 36.281,36.718 35.882,36.319 35.035,36.319 35.035,36.393 34.119,36.393 34.127,36.385 34.127,34.519 51.119,34.519 51.289,34.689 52.658,34.689 54.422,36.453 54.422,37.845 54.907,38.33 56.48,38.33 56.839,38.689 58.934,38.689 59.689,37.934 59.689,36.336 v1(60.2,35.825) v1@60.225,35.8 ; v1(58.6,23) 58.6,24.399 57.719,25.28 57.719,26.282 58.118,26.681 58.718,26.681 59.016,26.979 59.016,29.421 58.6,29.837 v1(58.6,33.4)
  Bottom Signal w0.254: v1(58.6,23) 61.6,23 61.6,21 62.319,20.281 62.882,20.281 64.163,19 66.981,19 *5.6@67.94,19.959 ; v1(58.6,33.4) 59.384,34.184 59.384,34.421 60.2,35.237 v1(60.2,35.825)
Net*2_18: *2.18 C6.1 C28.2 R21.2 R22.1 | length 79.8
  Top Signal w0.254: *2.18@27.355,53.111 27.355,51.645 27.973,51.027 28.785,51.027 28.958,51.2 29.384,51.2 29.438,51.146 30.091,51.146 30.318,50.919 30.882,50.919 31.109,51.146 31.812,51.146 32.212,50.746 32.454,50.746 32.481,50.719 33.6,50.719 ; v1(35.6,46.4) 36.492,47.292 36.492,48.478 36.067,48.903 35.529,48.903 35.07,49.362 34.58,49.362 33.788,50.154 33.6,50.154 33.6,50.719 ; C6.1@35.6,51.2 35.4,51.4 34.762,51.4 34.081,50.719 33.6,50.719
  Bottom Signal w0.254: v1(35.6,46.4) 35.6,46.437 36.118,45.919 36.844,45.919 37.119,45.644 37.119,37.356 37.081,37.318 37.081,37.203 37.119,37.165 37.119,34.672 37.081,34.634 37.081,34.561 38.28,33.362 48.588,33.362 49.015,32.935 52.609,32.935 53.274,32.27 53.274,31.084 53.4,30.958 53.4,28.437 54.929,26.908 55.871,26.908 56.081,27.118 56.081,29.556 55.465,30.172 55.465,31.27 55.519,31.324 55.519,31.952 53.984,33.487 53.984,37.947 55.416,39.379 55.416,40.221 54.821,40.816 53.989,40.816 53.984,40.821 54.108,40.945 54.108,43.908 54.7,44.5 C28.2@55.2,44.5
  Bottom Signal w0.508: C28.2@55.2,44.5 R22.1@57.2,44.5 R21.2@57.2,46.7
Net*2_23: *2.23 EPS.23 | length 55.9
  Top Signal w0.254: *2.23@29.845,53.111 29.873,53.082 29.873,52.377 30.64,52.377 30.663,52.4 36.946,52.4 36.946,46.783 35.882,45.719 35.84,45.719 35.719,45.598 35.719,44.918 36.118,44.519 36.681,44.519 37.119,44.081 37.119,36.914 36.07,35.865 35.265,35.865 35,35.6 v1(35,35.2) v1@35,35.337
  Bottom Signal w0.254: EPS.23@21.702,36.902 EPS.23@21.9,37.1 21.9,36.3 20.913,35.313 20.8,35.313 20.8,30.4 22,29.2 22.491,29.2 22.918,28.773 23.168,28.773 24.13,29.735 28.749,29.735 29.284,29.2 33.2,29.2 34.373,30.373 34.373,31.162 34.4,31.189 34.4,33.4 34.467,33.467 34.467,34.509 35,35.042 v1(35,35.2)
Net*2_24: "EPS MEM.6" "EPS PEX.12" *2.24 EPS.28 | length 53.4
  Top Signal w0.254: *2.24@30.353,53.111 32.511,53.111 ; v1(33.2,53.6) 33,53.6 32.511,53.111 ; v1(35.8,54.6) 36.111,54.289 36.111,53.111 32.511,53.111 ; v1(36.2,61.2) 36.4,61 v1(38.4,61)
  Bottom Signal w0.254: EPS.28@19.6,41 21.437,41 21.718,40.719 24.054,40.719 24.454,41.119 24.882,41.119 25.281,41.518 25.281,41.839 26.354,42.912 26.354,43.754 27.123,44.523 27.123,44.61 28.113,45.6 28.2,45.6 28.8,45.6 28.879,45.521 29.665,46.307 29.665,46.67 30.33,47.335 30.33,48.33 31.103,49.103 31.532,49.103 31.93,49.502 31.93,49.93 32.347,50.347 32.947,50.347 33.068,50.468 35.035,50.468 35.303,50.736 35.303,53.492 35.16,53.635 33.8,53.635 33.635,53.635 33.4,53.4 v1(33.2,53.6) ; 35.232,66.879 34.279,66.879 34.279,66.769 34.08,66.57 34.08,65.232 34.271,65.041 34.559,65.041 35.419,64.181 35.419,63.018 36.2,62.237 v1(36.2,61.2) ; v1(35.8,54.6) 35.8,55.213 36.398,55.811 36.858,55.811 37.136,56.089 37.689,56.089 38.265,56.665 38.265,57.67 38.4,57.805 38.4,59.037 38.319,59.118 38.319,60.919 v1(38.4,61)
Net*2_25: "EPS MEM.5" "EPS PEX.13" *2.25 EPS.9 | length 36
  Top Signal w0.254: *2.25@31.089,53.847 32.247,53.847 v1(33.2,54.8)
  Bottom Signal w0.254: EPS.9@28.2,44.2 28.2,44.6 28.667,45.067 29.067,45.067 30.119,46.119 30.119,46.482 30.784,47.147 30.784,48.142 31.291,48.649 31.72,48.649 32.384,49.314 32.384,49.742 32.443,49.801 33.401,49.801 33.614,50.014 35.223,50.014 35.757,50.548 35.757,53.723 35.561,53.919 35.518,53.919 35.119,54.318 35.119,55.174 36.21,56.265 36.67,56.265 36.948,56.543 37.343,56.543 37.811,57.011 37.811,57.858 37.946,57.993 37.946,58.849 37.719,59.076 37.719,61.282 37.733,61.296 37.265,61.764 37.265,62.644 37.689,63.068 37.689,64.911 36.381,66.219 35.232,66.219 ; v1(33.2,54.8) 33.305,54.905 33.8,54.905 34.905,54.905 35.246,55.246
Net*2_26: "EPS MEM.2" "EPS PEX.14" *2.26 EPS.8 | length 43.3
  Top Signal w0.254: *2.26@31.089,54.355 32.113,54.355 32.519,54.761 32.519,55.082 32.918,55.481 33.482,55.481 33.881,55.082 ; 33.823,55.14 33.823,55.2 ; 33.823,55.165 34.015,54.973 35.185,54.973 35.493,55.281 35.493,57.519 35.466,57.547 ; v1(35.36,58) 35.519,57.841 35.519,57.6
  Bottom Signal w0.254: EPS.8@26.7,45.7 26.7,46.737 26.319,47.118 26.319,47.682 26.7,48.063 26.7,51.8 ; 28.6,52.365 26.7,52.365 26.7,51.8 ; 35.232,65.584 36.692,64.124 36.692,63.671 36.781,63.582 36.781,63.018 36.692,62.929 36.692,61.671 36.881,61.482 36.881,58.881 36.483,58.483 35.564,58.483 ; v1(35.36,58) 35.36,58.278 35.564,58.483 ; 26.7,51.8 26.7,53.152 26.784,53.236 26.654,53.366 26.654,53.43 26.311,53.773 26.015,53.773 25.823,53.965 25.823,54.261 25.508,54.576 25.508,56.624 25.641,56.757 25.646,56.757 26.089,57.2 31.666,57.2 31.918,57.452 32.533,57.452 33.2,58.12 33.439,57.881 34.044,57.881 34.646,58.483 35.564,58.483
Net*3_1: "OBC 32M1.11" *3.1 C20.2 | length 6.8
  Bottom Signal w0.254: C20.2@24.4,13.3 25.3,14.2 *3.1@26.6,14.2 27.6,14.2 28.4,15 28.4,17.1
Net*3_3: "OBC 32M1.10" *3.3 C21.2 | length 13.6
  Bottom Signal w0.254: 29.2,17.1 29.2,15.8 29.4,15.6 33,15.6 33.8,14.8 33.8,13.363 33.519,13.082 33.519,12.518 33.8,12.237 33.8,11.8 32.8,11.8 ; *3.3@30.6,11.8 32.8,11.8 ; C21.2@32.8,12.7 32.8,11.8
Net*4_1: *4.1 C26.2 EPS.11 | length 9.8
  Bottom Signal w0.254: EPS.11@28.2,42.6 28.398,42.798 29.085,42.798 29.368,43.081 30.282,43.081 31,42.363 31,42.126 30.956,42.082 30.956,40.845 31.282,40.519 31.119,40.519 31.638,40 *4.1@32.2,40 32.243,39.957 32.243,37.657 C26.2@32.7,37.2
Net*4_3: *4.3 C27.2 EPS.10 | length 10.9
  Bottom Signal w0.254: EPS.10@28.2,43.4 28.335,43.535 29.772,43.535 30.118,43.881 30.682,43.881 31.273,43.29 31.273,42.965 31.465,42.773 33.573,42.773 34.272,43.472 34.6,43.472 *4.3@34.6,44 34.465,44.135 34.465,46.235 C27.2@34.1,46.6
Net*5_4: *5.4 BB1.12 BB1.13 BB1.14 Cout1.2 Coutx1.2 R23.1 Rfbt1.1 | length 14.9
  Bottom Signal w0.254: R23.1@68,16.1 69.1,16.1 69.26,16.26 *5.4@69.26,19.959 ; BB1.12@70.49,13.595 BB1.13@70.49,14.095 BB1.14@70.49,14.595
  Bottom Signal w0.508: Cout1.2@63.4,14.5 Coutx1.2@65.6,14.5 Rfbt1.1@68,14.5 68.095,14.595 BB1.14@70.49,14.595
  Bottom Signal w0.762: R23.1@68,16.1 Rfbt1.1@68,14.5 Rfbt1.1@68.095,14.595
Net*6_4: *6.4 BB2.12 BB2.13 BB2.14 Cout2.2 Coutx2.2 R24.1 Rfbt2.1 | length 19.1
  Bottom Signal w0.254: R24.1@65.8,31.9 65.9,32 67,32 68.86,33.86 *6.4@68.86,35.759 ; BB2.12@70.2,28.195 BB2.13@70.2,28.695 BB2.14@70.2,29.195
  Bottom Signal w0.508: Cout2.2@60.8,29.4 63.3,29.4 Coutx2.2@63.4,29.3 Rfbt2.1@65.8,29.3 ; R24.1@65.8,31.9 Rfbt2.1@65.8,29.3 ; BB2.14@70.2,29.195 69.795,29.6 66.1,29.6 Rfbt2.1@65.8,29.3
Net*7_4: *7.4 *8.4 *9.4 *10.4 *29.1 *29.2 R40.2 R41.2 R42.2 R43.2 | length 170.2
  Top Signal w0.254: 48,75 48,74.2 48.54,73.66 *7.4@49.359,73.66 ; *9.4@49.041,77.74 50.84,77.74 R42.2@51,77.9 ; R42.2@51.2,77.979 R42.2@51.44,77.74 ; 51.5,33.5 52.9,33.5 53.34,33.06 *8.4@53.559,33.06 ; *10.4@57.641,4.74 57.681,4.7 57.681,3.318 57.641,3.278 57.641,3.059 57.9,2.8
  Top Signal w0.762: 48,75.4 R40.2@49.2,75.4 ; R41.2@50.4,33.5 51.5,33.5 51.981,33.981 53.381,33.981 55.13,35.73 54.7,35.73 55.219,36.249 55.219,35.159 55.559,34.819 58.641,34.819 58.981,35.159 58.981,35.419 v2(60.4,34) 61.6,34 63.665,36.065 63.665,36.013 64.213,35.465 64.987,35.465 65.744,34.708 67.307,34.708 70,37.401 v2(70,40.8) 72.8,40.8 79.6,34 ; R42.2@51,77.9 51,77.6 50,76.6 48.6,76.6 47.065,75.065 47.065,72.013 47.742,71.335 48.065,71.335 48.282,71.118 48.289,71.118 49.963,69.443 50.556,69.443 51.11,68.889 51.11,68.847 52.292,67.665 53.857,67.665 54.122,67.4 ; 54.2,67.4 54.205,67.405 54.234,67.405 ; 54.246,67.405 54.234,67.405 ; R43.2@57.1,2 57.9,2.8 v2(58.8,2.8) 59.478,2.8 60.319,3.641 60.319,5.041 60.678,5.4 80.6,5.4 81.2,6 81.2,7.4 82.4,8.6 82.4,31.2 79.6,34 ; v2(58.4,59.4) 58.4,59.2 57.8,59.8 57.8,61.078 58.135,61.413 58.135,62.742 57.935,62.942 57.935,64.865 55.4,67.4 54.251,67.4 54.306,67.345 54.306,67.294 54.219,67.381 54.219,67.391 54.234,67.405 ; *29.2@72.26,31.39 *29.1@77.34,31.39 79.6,33.65 79.6,34
  Bottom Signal w0.762: v2(58.4,59.4) 59.6,59.4 66,53 66,44.8 v2(70,40.8)
Net*7_5: *7.5 *11.3 *12.3 *13.3 *15.3 R40.1 | length 79.6
  Top Signal w0.254: *7.5@49.359,73 50.2,73 50.4,73.2 50.4,74.4 50.6,74.6 51.2,74.6 51.2,75.4 51.2,76
  Top Signal w0.762: R40.1@50.6,75.4 51.2,76 51.9,76.7 ; *11.3@58.2,86.225 *12.3@69.8,86.225 70.103,86.225 70.413,86.535 71.187,86.535 71.497,86.225 *13.3@81.6,86.225 ; 61.4,67.6 60.4,68.6 56.801,68.6 56.42,68.981 54.896,68.981 54.065,69.813 54.065,71.387 54.2,71.522 54.2,74.6 52.1,76.7 51.9,76.7 ; *13.3@81.6,82.73 *12.3@69.8,82.73 64.726,82.73 64.126,82.13 63.074,82.13 62.474,82.73 *11.3@58.2,82.73 56.93,82.73 52.6,78.4 52.6,77.4 51.9,76.7
Net*8_5: *8.5 *16.3 *17.3 *18.3 *19.3 R41.1 | length 67.6
  Top Signal w0.254: R41.1@50.4,32.1 50.9,32.1 51.592,32.792 52.608,32.792 52.647,32.753 52.647,32.747 52.839,32.556 53.559,32.556 *8.5@53.559,32.4
  Top Signal w0.762: *17.3@16.6,31.8 28,31.8 *18.3@29.695,33.495 ; *17.3@16.6,35.295 *18.3@28.4,35.295 31.905,35.295 34.8,32.4 *16.3@40.375,32.4 ; *18.3@28.4,31.8 39.775,31.8 *16.3@40.375,32.4 ; 48.4,29.8 48.2,30 48.2,32.1 ; R41.1@50.4,32.1 48.2,32.1 ; *16.3@40.375,32.4 *16.3@40.8,32.825 45.975,32.825 46.7,32.1 48.2,32.1
Net*9_5: *9.5 *20.3 *21.3 *23.3 *24.3 R42.1 | length 69
  Top Signal w0.254: *9.5@49.041,78.4 49.041,78.502 49.783,78.502 50.007,78.725 50.007,79.007 50.3,79.3 R42.1@51,79.3
  Top Signal w0.762: *20.3@15.6,82.705 *23.3@40.4,82.705 ; *20.3@16.6,86.2 *21.3@28.4,86.2 ; *21.3@26.7,84.5 *21.3@28.4,86.2 ; 47.6,84.4 47.6,83.2 51,79.8 R42.1@51,79.3 ; 48.8,84.8 47.4,86.2 *21.3@28.4,86.2
Net*10_5: *10.5 *25.3 *26.3 *27.3 *28.3 R43.1 | length 82.5
  Top Signal w0.254: R43.1@55.7,2 55.7,2.3 v1(57,3.6) ; *10.5@57.641,5.4 58.8,5.4 v1(59.2,5)
  Top Signal w0.762: *27.3@16.8,1.975 *26.3@28.8,1.975 33.37,1.975 33.37,2.282 34.323,3.235 35.487,3.235 36.035,2.687 36.035,1.975 40.73,1.975 *25.3@40.8,1.905 47.583,1.905 48.513,2.835 49.587,2.835 50.517,1.905 51.57,1.905 52.198,2.533 53.423,2.533 53.425,2.535 54.387,2.535 54.935,1.987 54.935,1.905 55.605,1.905 R43.1@55.7,2 ; *27.3@16.8,5.47 *26.3@28.8,5.47 28.805,5.465 40.725,5.465 40.73,5.47 40.8,6 45.078,6 45.313,5.765 46.087,5.765 46.322,6 49.6,6
  Bottom Signal w0.254: v1(57,3.6) 57.6,4.2 59.2,4.2 v1(59.2,5)
Net*11_1: *11.1 *11.2 P8.4 | length 38
  Top Signal w0.762: *11.1@55.66,73.01 58.014,73.01 58.674,73.67 59.726,73.67 60.386,73.01 *11.2@60.74,73.01 63.245,73.01 63.245,72.277 63.335,72.187 63.335,71.669 64.274,70.73 65.326,70.73 65.396,70.8 65.8,70.8 69.2,67.4 80.8,67.4 83.165,65.035 84.087,65.035 84.635,64.487 84.635,63.565 85.4,62.8 P8.4@87.6,62.8
Net*12_1: *12.1 *12.2 P8.3 | length 26.6
  Top Signal w0.762: *12.1@67.26,73.01 *12.2@72.34,73.01 75.02,70.33 81.726,70.33 82.036,70.64 82.16,70.64 83.178,69.622 83.178,66.462 83.643,65.997 84.486,65.997 85.597,64.886 85.597,64.064 85.611,64.05 P8.3@87.6,64.05
Net*13_1: *13.1 *13.2 P8.2 | length 14.9
  Top Signal w0.762: *13.1@79.06,73.01 79.12,73.07 84.08,73.07 *13.2@84.14,73.01 84.14,67.703 86.543,65.3 P8.2@87.6,65.3
Net*14_3: "EPS PEX.21" *14.3 | length 27.6
  Top Signal w0.254: v1(40.8,62.6) 41.12,62.92 *14.3@41.12,64.8
  Bottom Signal w0.254: 27.968,69.47 28.085,69.587 29.299,69.587 34.55,74.838 36.236,74.838 36.638,74.436 36.638,72.546 36.908,72.277 37.978,72.277 38.377,71.878 38.377,70.808 38.481,70.703 38.481,65.718 38.4,65.637 38.4,65 v1(40.8,62.6)
Net*14_5: "EPS PEX.22" *14.5 | length 29.1
  Top Signal w0.254: v1(42.8,62.6) 42.8,62.8 43.66,63.66 *14.5@43.66,64.8
  Bottom Signal w0.254: 27.968,70.13 29.2,70.13 34.362,75.292 36.424,75.292 37.092,74.624 37.092,72.734 37.096,72.731 38.166,72.731 38.831,72.066 38.831,70.996 42.8,67.026 v1(42.8,62.6)
Net*14_10: "EPS PEX.23" *14.10 | length 25.5
  Top Signal w0.254: *14.10@43.66,69.524 43.66,70.66 44.6,71.6 v1(44.8,71.6)
  Bottom Signal w0.254: 27.968,70.765 28.965,70.765 33.946,75.746 36.612,75.746 37.546,74.812 37.546,73.244 37.605,73.185 38.354,73.185 39.285,72.254 39.285,71.184 39.644,70.825 40.208,70.825 40.983,71.6 v1(44.8,71.6)
Net*14_12: "EPS PEX.24" *14.12 | length 19.3
  Top Signal w0.254: v1(40,71.6) 40,71.548 39.926,71.474 41.12,70.28 *14.12@41.12,69.524
  Bottom Signal w0.254: 27.968,71.426 28.826,71.426 33.6,76.2 36.8,76.2 39.739,73.261 39.739,71.861 v1(40,71.6)
Net*16_1: *16.1 *16.2 P9.2 | length 43.5
  Top Signal w0.762: P9.2@7.7,26.875 8.925,26.875 9.2,26.6 9.2,20.6 11.038,18.762 17.479,18.762 17.814,19.097 20.786,19.097 21.418,18.465 30.714,18.465 31.184,18.935 34.745,18.935 34.918,18.762 35.84,18.762 36.688,19.61 *16.1@38.26,19.61 *16.2@43.34,19.61
Net*17_1: *17.1 *17.2 P9.4 | length 16.3
  Top Signal w0.762: P9.4@7.7,29.375 7.725,29.4 9.352,29.4 10.749,28.003 10.912,28.003 11.124,27.791 11.124,25.016 *17.1@14.06,22.08 14.267,21.873 15.205,21.873 15.413,22.08 *17.2@19.14,22.08
Net*18_1: *18.1 *18.2 P9.3 | length 32.3
  Top Signal w0.762: P9.3@7.7,28.125 9.266,28.125 10.162,27.229 10.162,21.238 11.676,19.724 17.081,19.724 17.416,20.059 21.184,20.059 21.519,19.724 21.924,19.724 23.265,21.065 23.265,21.387 23.958,22.08 *18.1@25.86,22.08 28.758,22.08 29.413,22.735 30.187,22.735 30.735,22.187 30.735,22.08 *18.2@30.94,22.08
Net*20_1: *20.1 *20.2 P10.4 | length 15.4
  Top Signal w0.762: P10.4@7.1,75.925 12.875,75.925 12.875,73.17 *20.1@13.06,72.985 13.06,73.182 13.265,73.387 13.265,73.587 13.813,74.135 14.587,74.135 14.722,74 15.6,74 15.743,73.857 15.743,73.337 15.789,73.337 16.142,72.985 *20.2@18.14,72.985
Net*21_1: *21.1 *21.2 P10.3 | length 26.7
  Top Signal w0.762: P10.3@7.1,74.675 10.725,74.675 11.897,73.503 11.897,71.401 12.432,70.866 13.224,70.866 13.625,70.465 21.621,70.465 24.141,72.985 *21.1@24.66,72.985 *21.2@29.74,72.985
Net*23_1: *23.1 *23.2 P10.2 | length 37.8
  Top Signal w0.762: P10.2@7.1,73.425 8.901,73.425 10.935,71.391 10.935,70.987 12.018,69.904 12.825,69.904 13.227,69.503 22.02,69.503 22.421,69.904 30.314,69.904 30.411,69.807 30.411,69.975 31.225,70.789 32.375,70.789 32.494,70.67 33.945,70.67 *23.1@36.26,72.985 *23.2@41.34,72.985
Net*25_1: *25.1 *25.2 P11.4 | length 38.7
  Top Signal w0.762: P11.4@7.7,16.175 11.375,16.175 13,17.8 17.878,17.8 17.93,17.852 18.705,17.852 18.753,17.804 19.028,18.079 19.502,18.079 19.558,18.135 20.387,18.135 21.019,17.503 31.112,17.503 31.409,17.8 32,17.8 33.065,16.735 33.065,16.613 33.878,15.8 37.58,15.8 *25.2@38.26,15.12 39.075,15.935 42.525,15.935 *25.1@43.34,15.12
Net*26_1: *26.1 *26.2 P11.2 | length 24.8
  Top Signal w0.762: P11.2@7.7,13.675 13.028,13.675 13.494,13.209 20.106,13.209 20.446,13.549 20.446,13.875 21.761,15.19 *26.2@26.26,15.19 *26.1@31.34,15.19
Net*27_1: *27.1 *27.2 P11.3 | length 11.7
  Top Signal w0.762: P11.3@7.7,14.925 13.995,14.925 14.26,14.79 *27.1@19.34,14.79